# Altium PCB anti_theft_device_pcb_PCB.PcbDoc
Units mm, origin at the board's own origin, x right, y up, seen from the top; angles counter-clockwise.
Board outline 60.07 x 65.15 mm, 2 copper layers (Top Layer, Bottom Layer); 9 components, 15 nets, 62 pads, 10 vias.
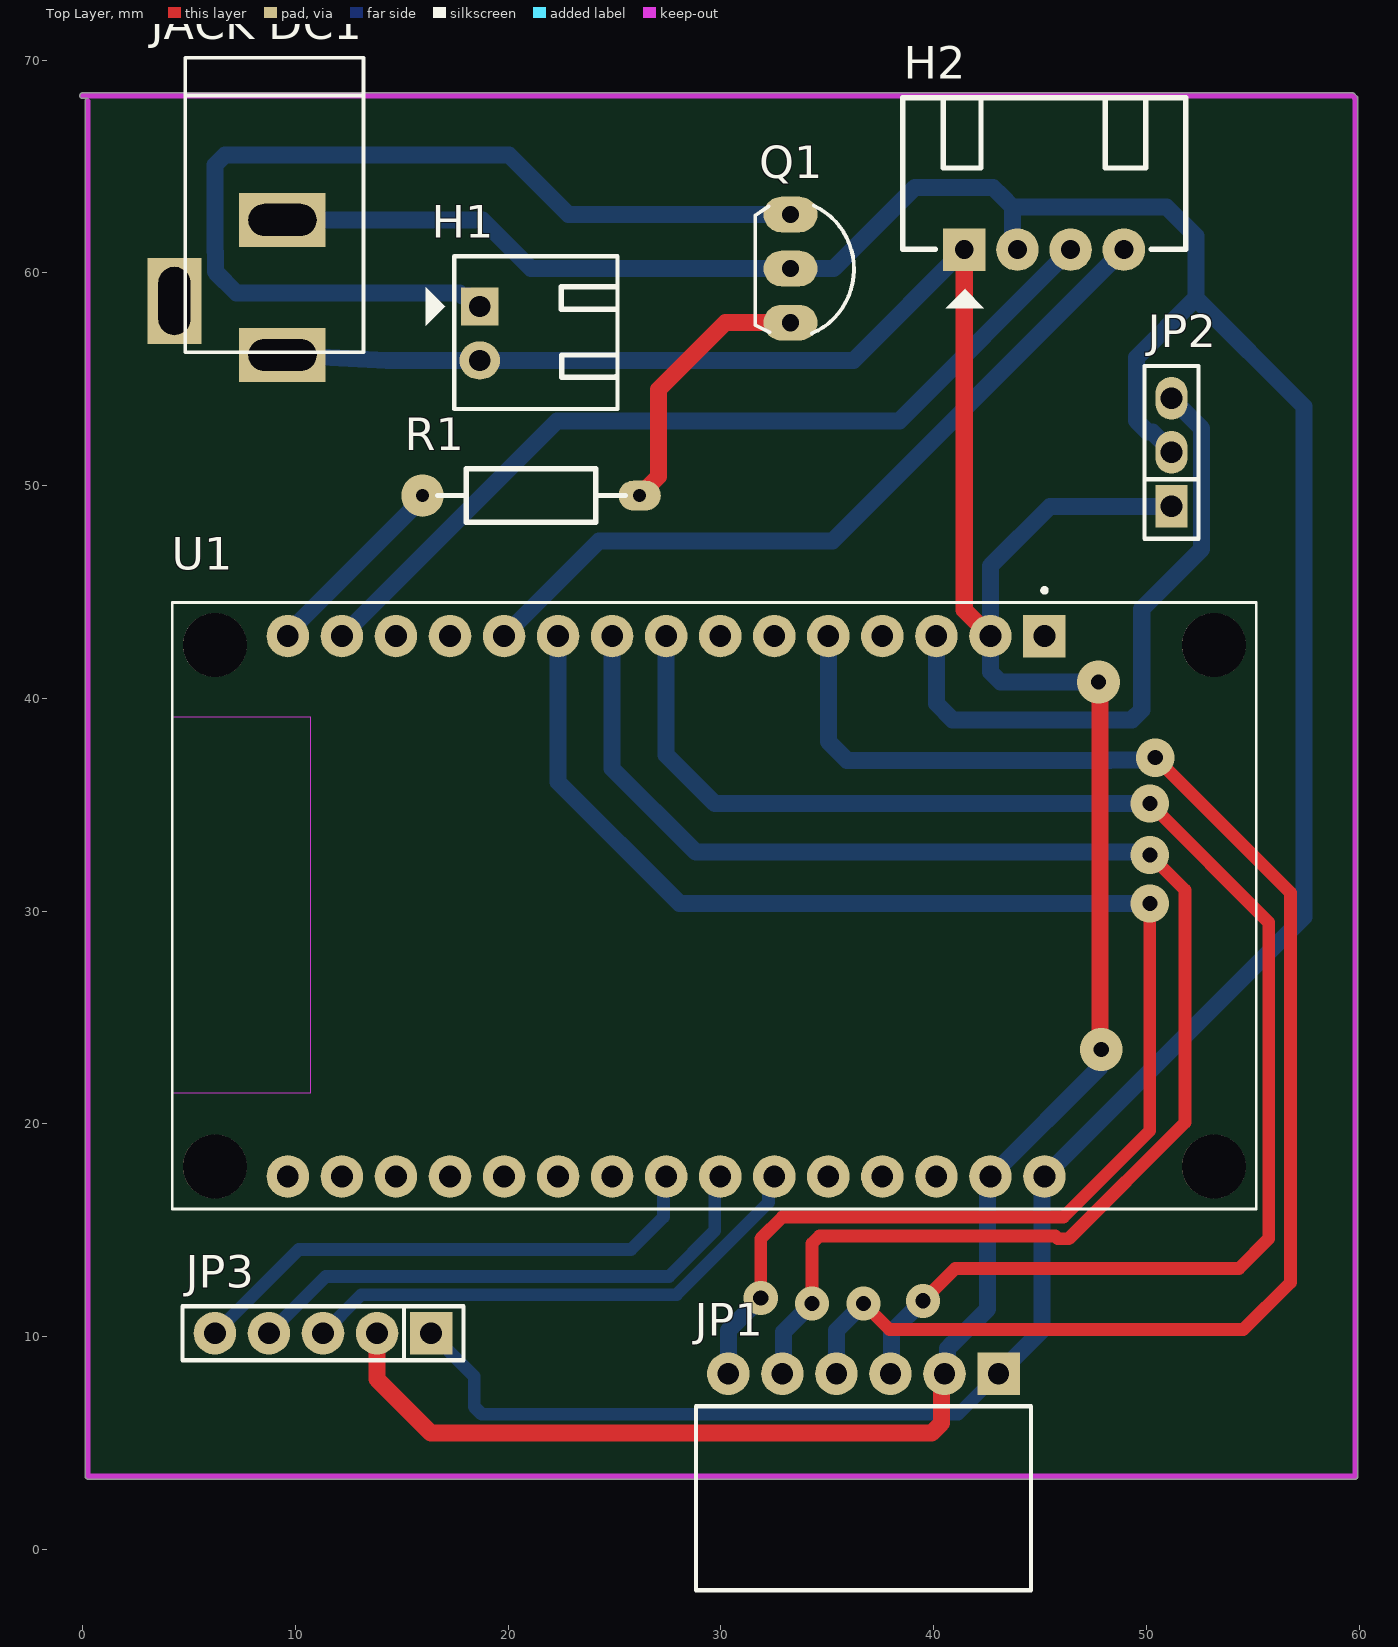
[diagram p0: Top Layer view]
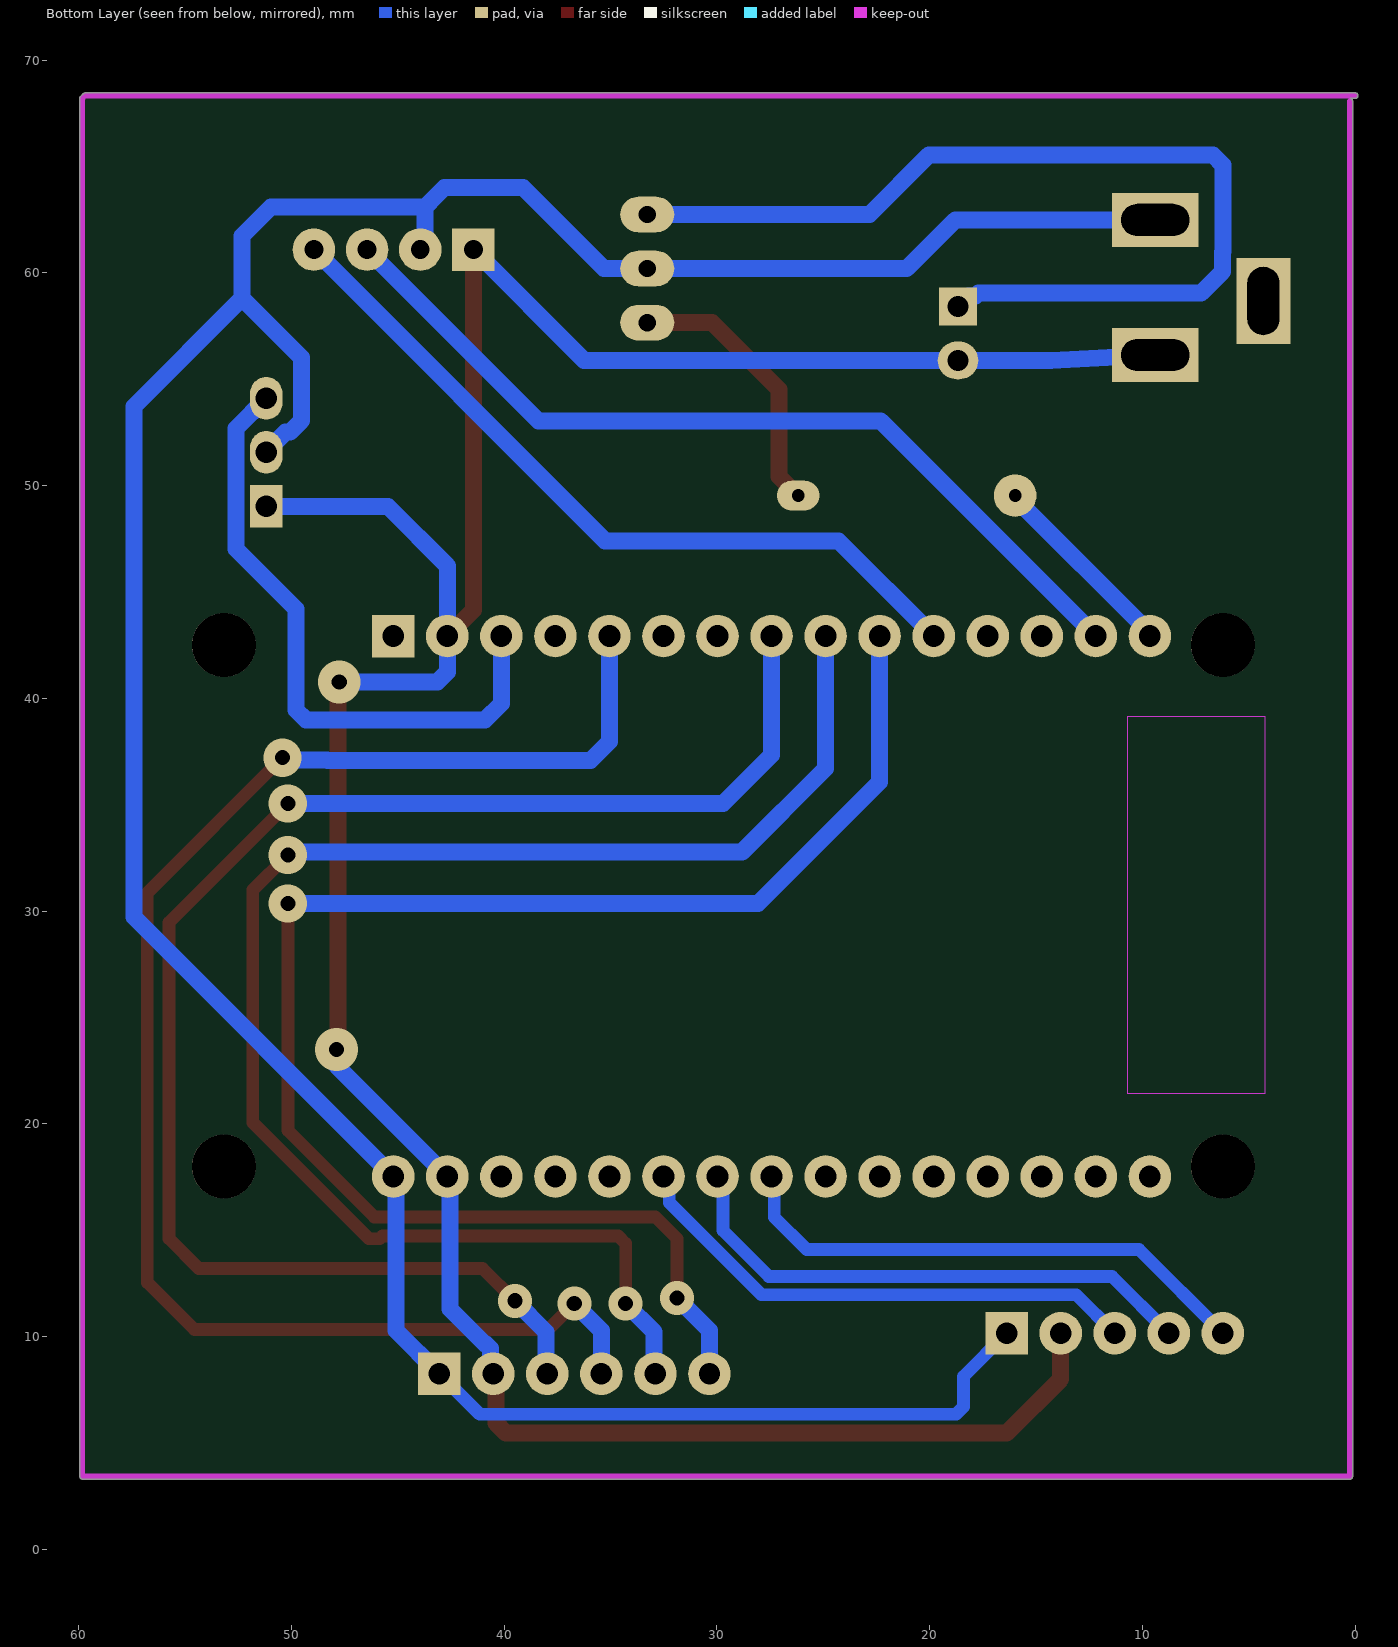
[diagram p1: Bottom Layer view, seen from below]
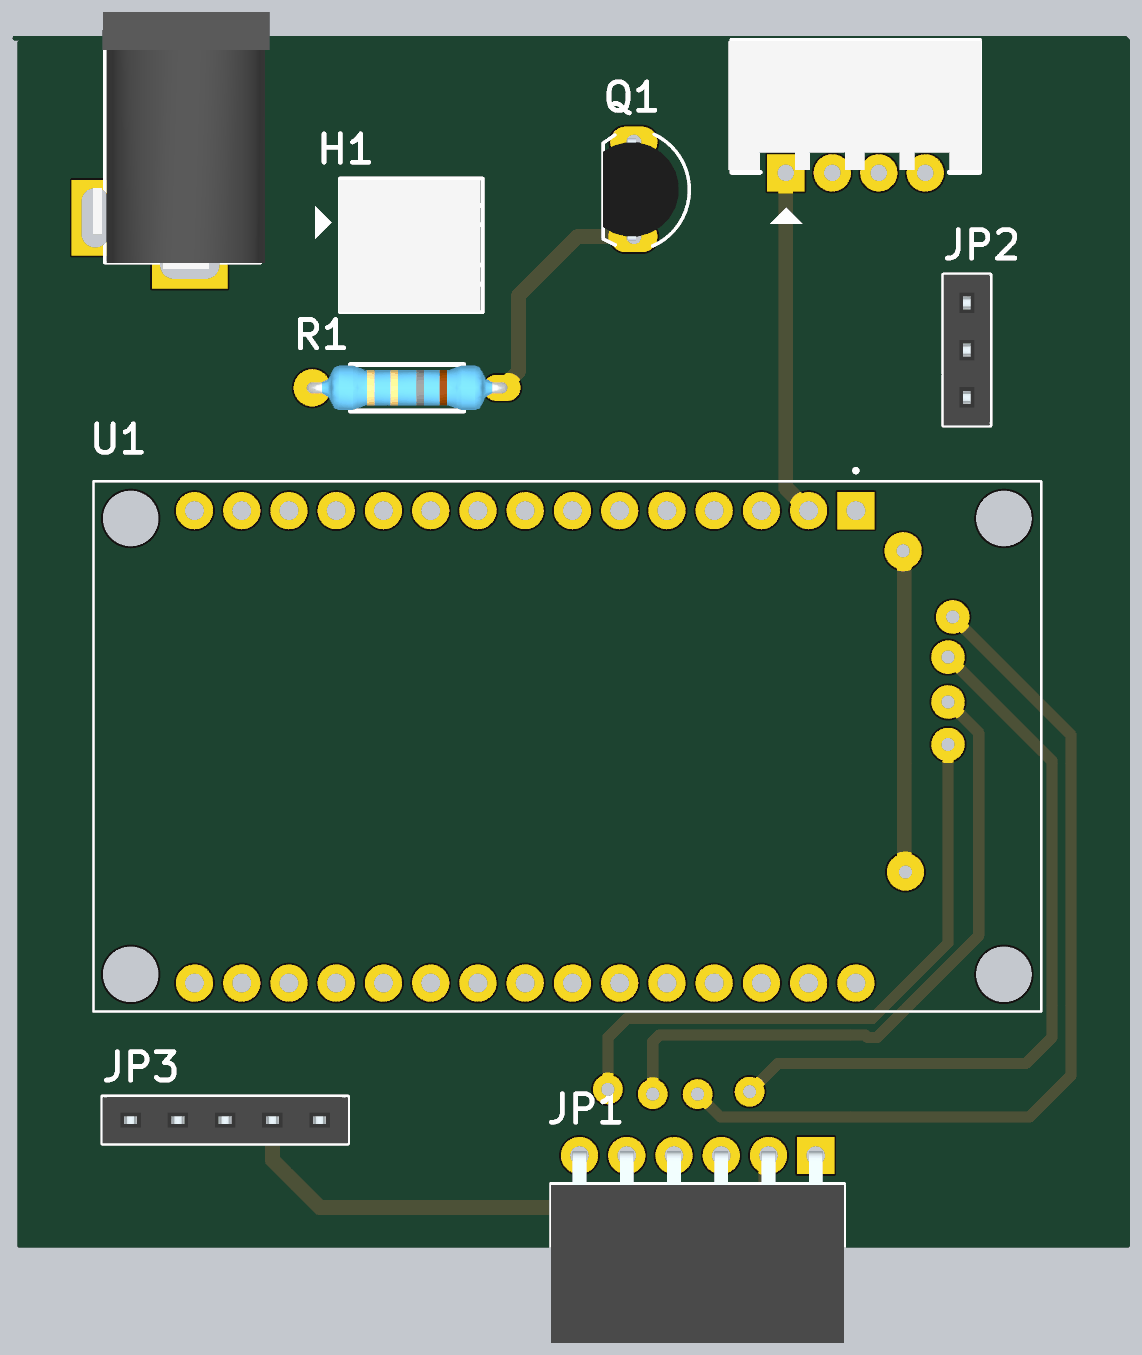
[diagram p2: 3D render of the assembled board from above, using the file's embedded part models]

## Layer stack, top to bottom
Top Solder: solder mask 0.0102, Solder Resist, Dk 3.5
Top Layer: signal copper 0.0356
Dielectric 1: dielectric 0.32, FR-4, Dk 4.8
Bottom Layer: signal copper 0.0356
Bottom Solder: solder mask 0.0102, Solder Resist, Dk 3.5

## Board outline
0.127,3.429 0.127,68.072 cw(c0.254,68.072) 0.24,68.199 0,68.199 cw(c0,68.326) 0,68.453 59.69,68.453 cw(c59.69,68.326) 59.781,68.416 59.907,68.289 cw(c59.818,68.199) 59.944,68.199 59.944,3.429 cw(c59.817,3.429) 59.817,3.302 0.254,3.302 cw(c0.254,3.429)

## Design rules (kind name [scope] priority, off if disabled: settings)
Clearance [All] p1: gap=0.254 ignorepadtopadclearanceinfootprint=FALSE except(0: Arc-Hole Track-Hole SMDPad-Hole THPad-Hole Via-Hole Fill-Hole Poly-Hole Region-Hole Text-Hole)
PolygonConnect [All] p1: connectstyle=Relief reliefconductorwidth=0.254 reliefentries=4 polygonreliefangle="90 Angle" airgapwidth=0.254
RoutingVias [All] p1: holewidth=0.711 width=1.6 viastyle="Through Hole" minholewidth=0.711 minwidth=1.27 maxholewidth=0.711 maxwidth=2
SolderMaskExpansion [All] p1: expansion=0.102 istentingtop=FALSE
Width [All] p1: maxlimit=1.2 minlimit=0.6 preferedwidth=0.8
30 further rules are at their usual default settings.

## Components (designator, comment, footprint, x,y, rotation, side; value= is the part's Value field where it differs from the comment)
H1 "Header 2P 2.54 Duc Cong" "Header 2P DC 2.54" 18.669,58.42 r0 top
H2 "Header 4P 2.54 Duc Cong" "Header 4P DC 2.54" 41.467,61.112 r90 top
"JACK DC1" "JACK DC 5.5" "JACK DC 5.5" 6.858,59.309 r270 top value="Jac DC"
JP1 "JP 1x6 2.54" "JP 1x6 CC" 36.703,8.255 r180 top
JP2 "JP 1x3 2.54" "JP 1x3 CT" 51.181,49.022 r90 top
JP3 "JP 1x5 2.54" "JP 1x5 CT" 16.383,10.16 r180 top
Q1 "C1815" TO92 33.274,60.198 r270 top value=C9014
R1 "3.9k" "tro vach 1/4w" 21.082,49.53 r0 top
U1 "ESP32-DEVKIT-V1" MODULE_ESP32_DEVKIT_V1 29.697,30.226 r270 top

## Footprints (in the part's own frame and the unit in brackets; to place one, negate y for a bottom-side part, rotate by r counter-clockwise, add the part's x,y. Pads: shape width x height; smd on the part's side, far side on the other; paste and mask are expansions set on the pad)
"Header 2P DC 2.54" [mil]
  rect 70x70 hole 39.37 unplated: 1(0,0)
  oval 75x70 hole 39.37 unplated: 2(0,-100)
  silkscreen extent -100,-190 255,93, body extent -50,-190 250,90, height 237
"Header 4P DC 2.54" [mil]
  rect 78.74x78.74 hole 35: 1(-1,1)
  round 78.74 hole 35: 2(-1,-97.43) 3(-1,-195.85) 4(-1,-294.28)
  silkscreen extent -110,-409 280,115, body extent 5,-413 278,123, height 290
"JACK DC 5.5" [mm] "Jac DC input"
  rect 2.54x4.064 hole 1.5 slot 3.2 at 90 deg: 1(3.175,2.54) 2(-3.175,2.54)
  rect 4.064x2.54 hole 1.5 slot 3.2 at 0 deg: 3(0.635,-2.54)
  silkscreen extent -10.8,-2.03 3.05,6.35, body extent -10.42,-2.67 3.4,6.84, height 11.02
"JP 1x3 CT" [mm]
  rect 2x1.52 hole 1.02: 1(0,0)
  oval 2x1.52 hole 1.02: 2(2.54,0) 3(5.08,0)
  silkscreen extent -1.52,-1.27 6.6,1.27, body extent -1.52,-1.25 6.6,1.25, height 8.51
"JP 1x5 CT" [mm]
  rect 2x2 hole 1.02: 1(0,0)
  round 2 hole 1.02: 2(2.54,0) 3(5.08,0) 4(7.62,0) 5(10.16,0)
  silkscreen extent -1.52,-1.27 11.68,1.27, body extent -1.52,-1.25 11.68,1.25, height 8.51
"JP 1x6 CC" [mm] "06p 1 row Right angle"
  rect 2x2 hole 1: 1(-6.35,0)
  round 2 hole 1: 2(-3.81,0) 3(-1.27,0) 4(1.27,0) 5(3.81,0) 6(6.35,0)
  silkscreen extent -7.87,1.52 7.87,10.17, body extent -7.87,-0.21 7.87,10.09, height 2.51
MODULE_ESP32_DEVKIT_V1 [mm]
  rect 2x2 / inner round 2 / far side rect 2x2 hole 1.02: 1(-12.7,15.515)
  round 2 hole 1.02: 2(-12.7,12.975) 3(-12.7,10.435) 4(-12.7,7.895) 5(-12.7,5.355) 6(-12.7,2.815) 7(-12.7,0.275) 8(-12.7,-2.265) 9(-12.7,-4.805) 10(-12.7,-7.345) 11(-12.7,-9.885) 12(-12.7,-12.425) 13(-12.7,-14.965) 14(-12.7,-17.505) 15(-12.7,-20.045) 16(12.7,-20.045) 17(12.7,-17.505) 18(12.7,-14.965) 19(12.7,-12.425) 20(12.7,-9.885) 21(12.7,-7.345) 22(12.7,-4.805) 23(12.7,-2.265) 24(12.7,0.275) 25(12.7,2.815) 26(12.7,5.355) 27(12.7,7.895) 28(12.7,10.435) 29(12.7,12.975) 30(12.7,15.515)
  round 3 hole 3 unplated: ""(-12.28,23.475) ""(-12.28,-23.475) ""(12.23,23.475) ""(12.23,-23.475)
  Keep-Out Layer region: 8.78,-25.475 -8.91,-25.475 -8.91,-18.985 8.78,-18.985
  Keep-Out Layer region: 8.78,-25.475 -8.91,-25.475 -8.91,-18.985 8.78,-18.985
  silkscreen extent -14.95,-25.48 14.23,25.48
TO92 [mil] "TO-92"
  oval 66x100 hole 32: 1(-100,0) 2(0,0) 3(100,0)
  silkscreen extent -117,-65 120,118, body extent -109,-66 109,95, height 245
"tro vach 1/4w" [mm]
  round 2 hole 0.6: 1(-5.1,0)
  oval 2x1.4 hole 0.6: 2(5.1,0)
  silkscreen extent -4.39,-1.25 4.42,1.25, body extent -5.38,-1.2 5.38,1.2, height 2.41

## Part data
H1 H2: "Cắm", Chung_Loai=Cắm, Don_Vi=Con
  H1: Ma_Hang=MH002852, Ten_Linh_Kien="Header 2P XH2.54-2P Đực Cong"
  H2: Ma_Hang=MH001310, Ten_Linh_Kien="Header 4P XH2.54-4P Đực Cong"
JP1: library part "JP 1x6 2.54 Cai Cong", "Cắm", Chung_Loai=Cắm, Don_Vi=Con, Ma_Hang=MH001265, Ten_Linh_Kien="Jump Đơn Cái 2.54MM 1x40P Cong"
JP2: library part "JP 1x3 2.54 Cai Thang", "Cắm", Chung_Loai=Cắm, Don_Vi=Con, Ma_Hang=MH004006, Ten_Linh_Kien="Jump Đơn Cái 2.54MM 1x20P Thẳng"
JP3: library part "JP 1x5 2.54 Cai Thang", "Cắm", Chung_Loai=Cắm, Don_Vi=Con, Ma_Hang=MH004006, Ten_Linh_Kien="Jump Đơn Cái 2.54MM 1x20P Thẳng"
Q1: library part "Trans C1815 DIP", "NPN transistor"
R1: library part "Tro Vach 1/4W 5% 9.1k", "Cắm", Chung_Loai=Cắm, Don_Vi=Con, Ma_Hang=MH008787, So_Chan=2, Ten_Linh_Kien="Trở Vạch 1/4w 5% 9.1k"
U1: "Dual core, Wi-Fi: 2.4 GHz up to 150 Mbits/s,BLE (Bluetooth Low Energy) and legacy Bluetooth, 32 bits, Up to 240 MHz", Package=None, Availability="Not in stock", Check_prices=https://www.snapeda.com/parts/ESP32-DEVKIT-V1/Do+it/view-part/?ref=eda, MF="Do it", MP=ESP32-DEVKIT-V1, Price=None, SnapEDA_Link=https://www.snapeda.com/parts/ESP32-DEVKIT-V1/Do+it/view-part/?ref=snap

## Via types
v1: diameter 1.6, hole 0.711, Top Layer to Bottom Layer, 4 vias
v2: diameter 1.8, hole 0.711, Top Layer to Bottom Layer, 4 vias
v3: diameter 2, hole 0.711, Top Layer to Bottom Layer, 2 vias

## Nets (pads, with @x,y where several pads share a name; then routed paths per layer and width w, separated by ;. In a path a pad name is that pad's centre, name@x,y a point inside that pad or via, vN(x,y) a via of type N, cw(c..) or ccw(c..) an arc to the next point about the centre after c; other vN are vias at no path point)
5V: "JACK DC1.2" H2.2 JP1.1 JP2.2 JP3.1 Q1.2 U1.30 | length 149.1
  Bottom Layer w0.6: JP3.1 18.415,8.128 18.415,6.701 18.766,6.35 41.148,6.35 JP1.1
  Bottom Layer w0.8: 9.398,62.484 18.796,62.484 21.082,60.198 Q1.2 35.306,60.198 39.116,64.008 42.799,64.008 43.18,63.627 43.712,63.095 ; JP1.1 45.085,10.287 45.085,17.399 U1.30 57.404,29.718 57.404,53.721 52.324,58.801 ; H2.2 43.712,61.317 43.712,63.095 ; JP2.2 51.181,51.607 50.283,52.505 50.071,52.505 49.53,53.047 49.53,56.007 52.324,58.801 ; 43.712,63.095 50.951,63.095 52.324,61.722 52.324,58.801
BUZZ: R1.1 U1.15 | length 9.2
  Bottom Layer w0.8: U1.15 9.652,43.063 15.982,49.393 R1.1
CLK: JP3.3 U1.25 | length 24.8
  Bottom Layer w0.6: JP3.3 13.116,11.973 27.913,11.973 32.244,16.304 32.244,17.258 U1.25
DAT: JP3.4 U1.24 | length 25.6
  Bottom Layer w0.6: JP3.4 11.43,12.827 27.559,12.827 29.718,14.986 29.718,17.272 U1.24
DWN_BTN: JP1.6 U1.10 | length 74.5
  Top Layer w0.6: v1(31.877,11.811) 31.877,14.605 32.893,15.621 46.101,15.621 50.165,19.685 v2(50.165,30.353)
  Bottom Layer w0.8: U1.10 22.352,36.068 28.067,30.353 v2@49.911,30.353 ; JP1.6 30.353,10.287 v1@31.623,11.557
GND: "JACK DC1.1" H1.2 H2.1 JP1.2 JP2.1 JP3.2 U1.2 U1.29 | length 140.8
  Top Layer w0.8: JP3.2 13.843,8.001 16.383,5.461 39.907,5.461 40.375,5.93 40.375,8.117 JP1.2 ; H2.1 41.442,44.156 U1.2 ; v3(47.752,40.767) 47.816,40.703 47.816,23.558 v3(47.879,23.495)
  Bottom Layer w0.8: 9.398,56.134 14.3,55.88 H1.2 36.235,55.88 H2.1 ; JP1.2 40.651,8.393 40.651,9.448 40.855,9.652 40.894,9.652 42.545,11.303 42.545,17.399 U1.29 47.879,22.733 v3(47.879,23.495) ; v3(47.752,40.767) 43.141,40.767 42.672,41.236 U1.2 42.672,46.228 45.466,49.022 JP2.1
NetH1_1: H1.1 Q1.1 | length 46.5
  Bottom Layer w0.8: H1.1 18.18,58.909 17.857,58.909 17.711,59.055 7.239,59.055 6.242,60.052 6.242,60.977 6.223,60.996 6.223,65.063 6.692,65.532 20.041,65.532 22.835,62.738 Q1.1
NetQ1_3: Q1.3 R1.2 | length 12.9
  Top Layer w0.8: R1.2 27.076,50.424 27.076,54.508 30.226,57.658 Q1.3
PROX_SENSOR: JP2.3 U1.3 | length 29.7
  Bottom Layer w0.8: U1.3 40.132,39.751 40.894,38.989 49.315,38.989 49.784,39.458 49.784,44.196 52.603,47.015 52.603,52.68 JP2.3
RST: JP3.5 U1.23 | length 25.3
  Bottom Layer w0.6: JP3.5 10.16,14.097 25.781,14.097 27.31,15.626 27.31,17.404 U1.23
SCL: H2.3 U1.14 | length 41.8
  Bottom Layer w0.8: U1.14 22.301,53.035 38.39,53.035 H2.3
SDA: H2.4 U1.11 | length 36.7
  Bottom Layer w0.8: U1.11 24.282,47.396 35.251,47.396 H2.4
SET_BTN: JP1.4 U1.5 | length 73.4
  Top Layer w0.6: v1(36.703,11.557) 37.93,10.33 54.556,10.33 56.769,12.543 56.769,30.861 v2(50.419,37.211)
  Bottom Layer w0.8: U1.5 35.052,37.973 35.941,37.084 48.3,37.084 48.319,37.103 50.311,37.103 v2(50.419,37.211) ; JP1.4 35.433,10.287 v1(36.703,11.557)
ST_BTN: JP1.3 U1.8 | length 73.6
  Top Layer w0.6: v1(39.497,11.684) 41.021,13.208 54.356,13.208 55.753,14.605 55.753,29.464 v2(50.165,35.052)
  Bottom Layer w0.8: U1.8 27.432,37.338 29.718,35.052 v2(50.165,35.052) ; JP1.3 38.028,8.31 38.028,10.215 v1(39.497,11.684)
UP_BTN: JP1.5 U1.9 | length 72.8
  Top Layer w0.6: v1(34.29,11.557) 34.29,14.381 34.641,14.732 45.72,14.732 45.852,14.6 46.35,14.6 51.816,20.066 51.816,30.988 v2(50.165,32.639)
  Bottom Layer w0.8: U1.9 24.892,36.703 28.829,32.766 v2@49.911,32.766 ; JP1.5 32.948,8.31 32.948,10.215 v1(34.29,11.557)
pads on no net: "JACK DC1.3" U1. U1.1 U1.4 U1.6 U1.7 U1.12 U1.13 U1.16 U1.17 U1.18 U1.19 U1.20 U1.21 U1.22 U1.26 U1.27 U1.28

## Keep-outs
Keep-Out Layer:
  lines w0.254: 0,68.326 59.69,68.326 59.817,68.199 59.817,3.429 0.254,3.429 0.254,68.072